# Altium PCB Tesla Coil PCB.PcbDoc
Units mil, origin at the board's own origin, x right, y up, seen from the top; angles counter-clockwise.
Board outline 5160.03 x 2730.03 mil, 2 copper layers (Top Layer, Bottom Layer); 43 components, 22 nets, 130 pads, 15 vias.
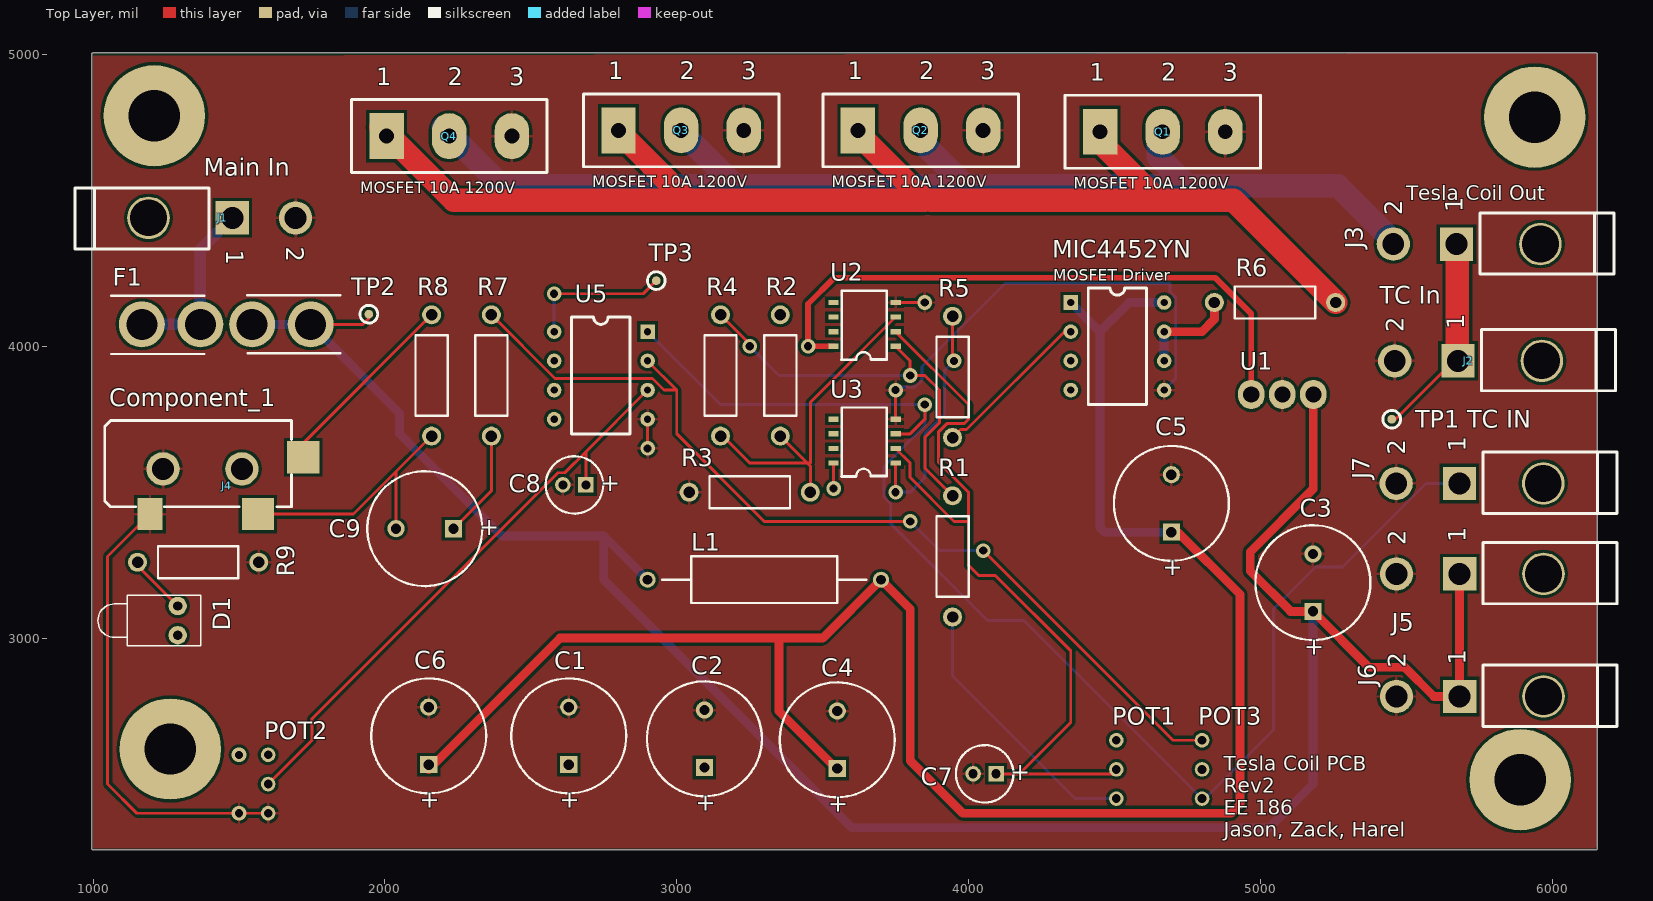
[diagram p0: Top Layer view]
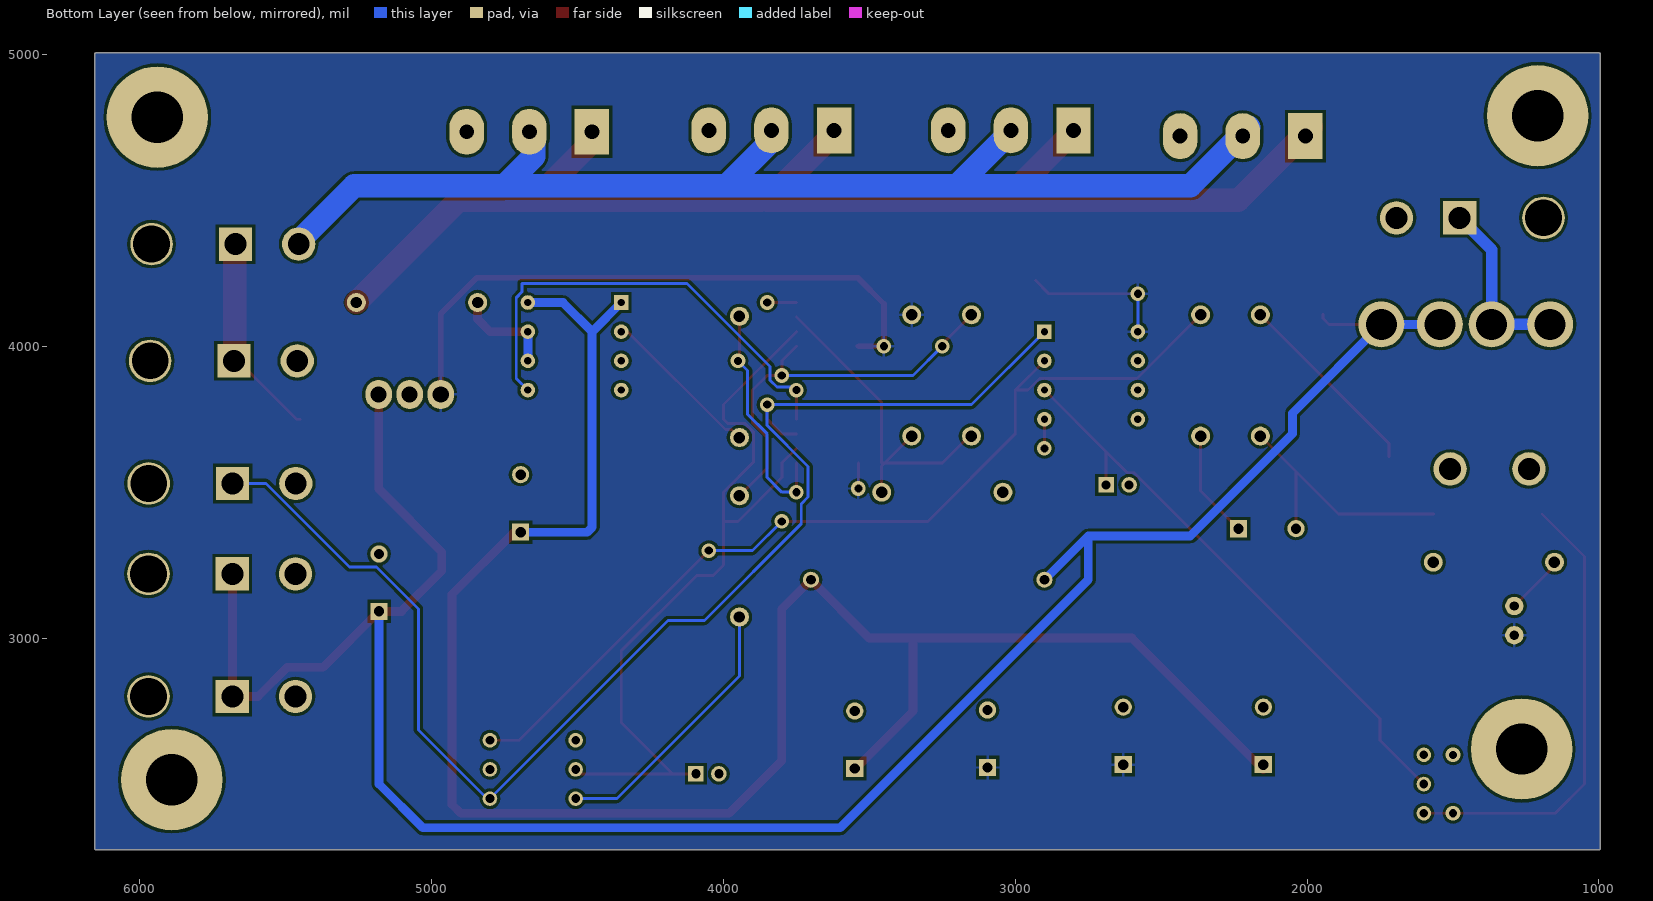
[diagram p1: Bottom Layer view, seen from below]

## Layer stack, top to bottom
Top Solder: solder mask 0.4, Solder Resist, Dk 3.5
Top Layer: signal copper 1.4
Dielectric 1: dielectric 12.6, FR-4, Dk 4.8
Bottom Layer: signal copper 1.4
Bottom Solder: solder mask 0.4, Solder Resist, Dk 3.5

## Board outline
995.65,2282.5 cw(c1000,2285) 994.99,2285 994.99,5000 cw(c1000,5000) 1000,5005.02 6150,5005.02 cw(c6150,5000) 6155.02,5000 6155.02,2280 cw(c6150,2280) 6150,2274.99 1000,2274.99 cw(c1000,2280)

## Design rules (kind name [scope] priority, off if disabled: settings)
Clearance [All] p1: gap=10
PlaneConnect [All] p1: planeconnectstyle=Relief reliefexpansion=20 reliefentries=4 reliefconductorwidth=20 reliefairgap=10
PolygonConnect [All] p1: connectstyle=Relief reliefconductorwidth=10 reliefentries=4 polygonreliefangle="90 Angle" airgapwidth=10
RoutingVias [All] p1: holewidth=28 width=50 viastyle="Through Hole" minholewidth=28 minwidth=50 maxholewidth=28 maxwidth=50
SolderMaskExpansion [All] p1: expansion=4
Width [All] p1: maxlimit=100 minlimit=10 preferedwidth=10 minimp=50.000000 maximp=50.000000 favimp=50.000000
29 further rules are at their usual default settings.

## Components (designator, comment, footprint, x,y, rotation, side; value= is the part's Value field where it differs from the comment)
C1 "Cap 5-10x30" CAPPR5-10X30 2630,2665 r90 top
C2 "Cap 5-10x30" CAPPR5-10X30 3095,2655 r90 top
C3 "Cap 5-10x30" CAPPR5-10X30 5180,3190 r90 top
C4 "Cap 5-10x30" CAPPR5-10X30 3550,2651.57 r90 top
C5 "Cap 5-10x30" CAPPR5-10X30 4695,3461.57 r90 top
C6 "Cap 5-10x30" CAPPR5-10X30 2150,2665 r90 top
C7 "Cap 2-5x11" CAPPR2-5X11 4055,2535 r180 top
C8 "Cap 2-5x11" CAPPR2-5X11 2649.37,3525 r180 top
C9 "Cap 5-10x30" CAPPR5-10X30 2136.57,3375 r180 top
D1 "LED1" LED-1 1290,3060 r180 top
F1 "1A" "Blade Fuse" 1566.42,3355 r90 top
J1 "Main In" "Mini-Fit Jr. 2" 1359.29,4440 r270 top
J2 "TC In" "Mini-Fit Jr. 2" 5795,3950 r90 top
J3 "TC Out" "Mini-Fit Jr. 2" 5790,4350 r90 top
J4 "Component_1" "3.5Jack Foot" 1715,3625 r180 top
J5 "Fan1" "Mini-Fit Jr. 2" 5800.71,3220 r90 top
J6 "Fan2" "Mini-Fit Jr. 2" 5800.71,2800 r90 top
J7 "Ext_IN" "Mini-Fit Jr. 2" 5800,3530 r90 top
L1 "Inductor Adj" AXIAL-0.8 3300,3200 r0 top
MIC4452YN "MOSFET Driver" MIC441/44 4350,4150 r0 top
POT1 "100k Pot Thumbwheel" "10K Pot 3352T" 4506.41,2450 r90 top
POT2 "100k Pot Thumbwheel" "10K Pot 3352T" 1600,2400 r90 top
POT3 "100k Pot Thumbwheel" "10K Pot 3352T" 4800,2450 r90 top
Q1 "SCT2450KEC" SCT2450KEC 4455.43,4735 r0 top
Q2 "SCT2450KEC" SCT2450KEC 3625.87,4740 r0 top
Q3 "SCT2450KEC" SCT2450KEC 2805.43,4740 r0 top
Q4 "SCT2450KEC" SCT2450KEC 2010.87,4720 r0 top
R1 "R Thru Hole" RES10.55-7X2.8 3945,3280 r270 top
R2 "R Thru Hole" RES10.55-7X2.8 3355,3900 r90 top
R3 "R Thru Hole" RES10.55-7X2.8 3250,3500 r0 top
R4 "R Thru Hole" RES10.55-7X2.8 3150,3900 r90 top
R5 "R Thru Hole" RES10.55-7X2.8 3945,3895 r270 top
R6 "R Thru Hole" RES10.55-7X2.8 5050,4150 r0 top
R7 "R Thru Hole" RES10.55-7X2.8 2365,3900 r270 top
R8 "R Thru Hole" RES10.55-7X2.8 2160,3900 r270 top
R9 "R Thru Hole" RES10.55-7X2.8 1360,3260 r180 top
"TP1 TC IN" "Test Point" "Test Point" 5450,3750 r0 top (schematic designator TP1)
TP2 "Test Point" "Test Point" 1945,4110 r90 top
TP3 "Test Point" "Test Point" 2930,4225 r90 top
U1 "REG" "5V REG" 5393.9,3835 r270 top
U2 "MCP6562-E/SN" MCP6562 3750,4000 r90 top
U3 "MCP6562-E/SN" MCP6562 3750,3600 r90 top
U5 "LM358 (DIP Socket)" 3M5473-ND- 2900,3750 r180 top

## Footprints (in the part's own frame and the unit in brackets; to place one, negate y for a bottom-side part, rotate by r counter-clockwise, add the part's x,y. Pads: shape width x height; smd on the part's side, far side on the other; paste and mask are expansions set on the pad)
"3.5Jack Foot" [mm]
  rect 2.8x2.8 smd: 1(3.81,5.08) 2(-0.127,0.127)
  round 2.9 hole 1.9: 3(12.065,1.143) 4(5.207,1.143)
  rect 2.2x2.794 smd: 3(13.208,5.08)
  silkscreen extent 0.89,-3.05 17.14,4.45
3M5473-ND- [mil]
  rect 50x50 hole 25: 1(0,-300)
  round 50 hole 25: 2(0,-200) 3(0,-100) 4(0,0) 5(320,0) 6(320,-100) 7(320,-200) 8(320,-300)
  silkscreen extent 60,-350 260,50
"5V REG" [mm]
  oval 2.54x2.3 hole 1.4: 1(0,-5.4) 2(0,-8.1) 3(0,-10.8)
"10K Pot 3352T" [mil]
  round 50 hole 30: 1(0,0) 2(100,0) 3(200,0)
AXIAL-0.8 [mm] "Axial Device, Thru-Hole; 2 Leads; 0.8 in Pin Spacing"
  round 1.4 hole 0.85: 1(-10.16,0) 2(10.16,0)
  silkscreen extent -8.89,-2.03 8.89,2.03
"Blade Fuse" [mm]
  round 4 hole 2.7 mask+0.064: 1(18.288,5.044) 1(18.288,10.144) 2(18.288,-4.556) 2(18.288,0.544)
  silkscreen extent 15.71,-7.16 20.81,12.82
CAPPR2-5X11 [mm]
  rect 1.35x1.35 hole 0.8: 1(-1,0)
  round 1.35 hole 0.8: 2(1,0)
  silkscreen extent -2.5,-2.5 2.5,2.5
CAPPR5-10X30 [mm]
  rect 1.5x1.5 hole 0.9: 1(-2.5,0)
  round 1.5 hole 0.9: 2(2.5,0)
  silkscreen extent -5,-5 5,5
LED-1 [mm] "Typical RED GaAs LED; 2 Leads"
  round 1.6 hole 0.8: 1(0,1.27) 2(0,-1.27)
  silkscreen extent -2,-2.2 6.95,2.2
MCP6562 [mm] "1.8V Output Comparator"
  rect 0.45x0.9 smd: 1(0,0) 2(1.27,0) 3(2.54,0) 4(3.81,0) 5(3.81,5.4) 6(2.54,5.4) 7(1.27,5.4) 8(0,5.4)
  silkscreen extent -1.17,0.76 4.83,4.7
MIC441/44 [mil]
  rect 50x50 hole 25: 1(0,0)
  round 50 hole 25: 2(0,-100) 3(0,-200) 4(0,-300) 5(320,-300) 6(320,-200) 7(320,-100) 8(320,0)
  silkscreen extent 60,-350 260,50
"Mini-Fit Jr. 2" [mm]
  rect 2.9x2.9 hole 1.9: 1(0,3)
  round 2.9 hole 1.9: 2(0,8.5)
  round 3.7 hole 3.2: 3(0,-4.3)
  silkscreen extent -2.6,-10.7 2.73,0.95, body extent -2.6,-10.87 3.2,9.07, height 11.4
RES10.55-7X2.8 [mm]
  round 1.65 hole 1: 1(-5.275,0) 2(5.275,0)
  silkscreen extent -3.5,-1.4 3.5,1.4
SCT2450KEC [mm] "Power MOSFET 10A, 1200V"
  rect 3x4 hole 1.3: 1(-0.127,0)
  oval 3x4 hole 1.3: 2(5.323,0) 3(10.773,0)
  silkscreen extent -3.17,-3.17 13.84,3.17
"Test Point" [mil] "Round Pad for Probing"
  round 30 smd: 1(0,0)
  silkscreen extent -30,-30 30,30

## Part data
C1 C2 C3 C4 C5 C6 C9: "Cap, Gen, 5-10x30"
C7 C8: "Cap, Gen, 2-5x11"
D1: "Typical RED GaAs LED"
F1: library part "Fuse 2", "Fuse"
J1 J2 J3 J5 J6 J7: library part "Mini-Fit Jr. 2-pin", "Mini-Fit Jr. 2-pin Right Angle"
L1: "Adjustable Inductor"
R1 R2 R3 R4 R5 R6 R7 R8 R9: "R, Gen, Thru Hole"

## Free pads (board coordinates)
  round 347.24 hole 175.98: 1(1210,4790) 1(1265,2620) 1(5890,2515) 1(5940,4785)

## Via types
v1: diameter 50, hole 28, Top Layer to Bottom Layer, 15 vias

## Nets (pads, with @x,y where several pads share a name; then routed paths per layer and width w, separated by ;. In a path a pad name is that pad's centre, name@x,y a point inside that pad or via, vN(x,y) a via of type N, cw(c..) or ccw(c..) an arc to the next point about the centre after c; other vN are vias at no path point)
5V: C1.1 C2.1 D1.1 R2.2 TP3.1 U1.3 U2.8 U3.8 U5.8 | length 2714.6
  Top Layer w10: v1(2580,4180) 2885,4180 TP3.1 ; R2.2@3355,4095 R2.2 ; v1(3537.4,3512.6) U3.8
  Top Layer w20: U2.8 v1(3450,4000) 3450,4145 3540,4235 4845,4235 4968.7,4111.3 U1.3
  Bottom Layer w10: U5.8 v1(2580,4180)
12V: C3.1 F1.2 J5.1 J6.1 L1.1 TP2.1 U1.1 | length 7601.6
  Top Layer w10: F1.2@1745.79,4075 1925,4075 1945,4095 TP2.1
  Top Layer w30: U1.1 5181.3,3511.3 4965,3295 4965,3230 5103.43,3091.57 C3.1 5371.57,2900 5495,2900 5595,2800 J6.1 J5.1
  Bottom Layer w30: F1.2@1545,4075 1745.79,4075 2050,3770.79 2050,3700 2400,3350 2750,3350 ; L1.1 2750,3350 ; C3.1@5180,3101.57 C3.1 ; C3.1@5190,3081.57 C3.1 ; 2750,3350 2750,3200 3600,2350 5030,2350 5180,2500 C3.1
"12V D": C4.1 C5.1 C6.1 L1.2 MIC4452YN.1 MIC4452YN.8 | length 6598.6
  Top Layer w30: C6.1@2150,2550 2600,3000 3350,3000 ; C4.1@3550,2550 3350,2750 3350,3000 ; C5.1 4716.85,3363.15 4930,3150 4930,2430 4900,2400 3980,2400 3800,2580 3800,3100 L1.2 3500,3000 3350,3000
  Bottom Layer w30: MIC4452YN.1 4450,4050 ; MIC4452YN.8 4550,4150 4450,4050 ; C5.1 4466.85,3363.15 4450,3380 4450,4050
GND: C1.2 C2.2 C3.2 C4.2 C5.2 C6.2 C7.2 C8.2 J1.2 J2.2 J4.3 J5.2 J6.2 J7.2 MIC4452YN.5 POT2.1 Q1.3 Q2.3 Q3.3 Q4.3 R3.1 R9.1 U1.2 U2.4 U3.4 U5.4 | length 3385.1
  Top Layer w10: J4.3@1195,3425 1050,3280 1050,2500 1150,2400 v1(1500,2400) POT2.1 ; v1(2900,3650) U5.4 ; U3.4 v1(3750,3850) ; U2.4 v1(3850,4150)
  Bottom Layer w10: v1(3750,3850) 3760,3860 3816.57,3860 3840,3883.43 3840,3930.53 4124.47,4215 4690,4215 4690,4186.57 4710,4166.57 4710,3890 MIC4452YN.5
NetC7_1: C7.1 POT1.2 U2.2 U3.2 | length 2807.3
  Top Layer w10: U3.2 3800,3600 3800,3550 3950,3400 4000,3400 ; U2.2 4000,3800 4000,3750 3984.8,3734.8 3925.33,3734.8 3897.52,3706.99 3897.52,3602.48 4000,3500 4000,3400 ; C7.1 4174.37,2535 ; POT1.2 4491.41,2535 4174.37,2535 ; 4000,3400 4000,3250 4035,3215 4091.57,3215 4350,2956.57 4350,2710.63 4174.37,2535
  Bottom Layer w10: POT1.2@4489.37,2550 POT1.2
NetC8_1: C8.1 POT2.2 U5.3 | length 2016.2
  Top Layer w10: POT2.2 1750,2650 1750,2723.8 2592.78,3566.57 2616.57,3566.57 2688.74,3638.74 ; C8.1 2688.74,3638.74 ; U5.3 2688.74,3638.74
NetC9_1: C9.1 R7.2 | length 371.2
  Top Layer w10: C9.1 2365,3505 R7.2
NetC9_2: C9.2 J4.1 R8.2 | length 901.2
  Top Layer w10: J4.1 1892.68,3425 2038.15,3570.47 ; C9.2 2038.15,3570.47 ; R8.2 2038.15,3570.47
NetD1_2: D1.2 R9.2 | length 207
  Top Layer w10: R9.2 1152.32,3247.68 D1.2
NetF1_1: F1.1 J1.1 | length 611.2
  Bottom Layer w40: F1.1@1167.05,4075 1367.83,4075 1367.83,4330.43 J1.1
NetJ3_2: J3.2 Q1.2 Q2.2 Q3.2 Q4.2 | length 4219.3
  Bottom Layer w80: Q4.2@2200,4750 2400,4550 3200,4550 ; Q3.2@3000,4750 3200,4550 ; Q2.2@3835.43,4750 Q2.2 3835.43,4704.57 3990,4550 ; Q1.2@4650,4750 4650,4650 4750,4550 ; J3.2@5465.35,4350 5265.35,4550 4750,4550 ; 3200,4550 3990,4550 ; 3990,4550 4750,4550
NetJ4_2: J4.2 R8.1 | length 669.9
  Top Layer w10: J4.2 1720,3667.68 R8.1
NetJ7_1: J7.1 POT3.1 U3.3 U5.1 | length 4729.3
  Top Layer w10: U3.3 3800,3700 3850,3750 v1(3850,3800)
  Bottom Layer w10: U5.1 3150,3800 v1(3850,3800) 3850,3728.28 3710,3588.28 3710,3483.43 3733.43,3460 3733.43,3391.57 4065,3060 4190,3060 POT3.1 4810,2450 5045,2685 5045,3100 5188.9,3243.9 5281.2,3243.9 5567.3,3530 J7.1
NetMIC4452YN_2: MIC4452YN.2 R5.2 | length 555.2
  Top Layer w10: R5.2 3972.48,3714.8 3993.09,3714.8 4328.28,4050 MIC4452YN.2
NetMIC4452YN_6: MIC4452YN.6 MIC4452YN.7 R6.1 | length 358.4
  Top Layer w10: MIC4452YN.7 MIC4452YN.7@4677.68,4057.68
  Top Layer w30: MIC4452YN.7 4800,4050 4842.32,4092.32 R6.1
  Bottom Layer w30: MIC4452YN.6 MIC4452YN.7
NetPOT1_1: POT1.1 R1.2 | length 931.3
  Bottom Layer w10: R1.2 3945,2870 4365,2450 POT1.1@4500,2450
NetPOT3_3: POT3.3 R7.1 U5.2 | length 3268.1
  Top Layer w10: R7.1 2582.68,3890 2916.57,3890 2956.57,3850 3000,3850 ; U5.2 3000,3850 ; v1(3800,3400) 3300,3400 3000,3700 3000,3850 ; v1(4050,3300) 4700,2650 POT3.3
  Bottom Layer w10: v1(3800,3400) 3900,3300 v1(4050,3300)
NetQ1_1: Q1.1 Q2.1 Q3.1 Q4.1 R6.2 | length 4531.1
  Top Layer w10: Q1.1@4435.43,4714.57 Q1.1@4435.43,4750
  Top Layer w80: Q4.1@1985.43,4750 2235.43,4500 3035.43,4500 ; Q3.1@2785.43,4750 3035.43,4500 ; Q2.1@3610.43,4739.57 3850,4500 3035.43,4500 ; 3870.87,4500 4650,4500 ; Q1.1@4435.43,4714.57 4650,4500 ; R6.2 4907.68,4500 4650,4500
NetR1_1: R1.1 R4.2 U2.1 | length 1396.6
  Top Layer w10: R4.2 v1@3250,4007.68 ; U2.1 3800,3950 v1(3800,3900) 3850,3900 3900,3850 3900,3737.75 3850,3687.75 3850,3582.68 R1.1
  Bottom Layer w10: v1(3250,4000) 3350,3900 v1(3800,3900)
NetR2_1: R2.1 R3.2 R4.1 U2.3 | length 1201.9
  Top Layer w10: R4.1 3157.68,3692.32 3250,3600 3447.32,3600 ; R2.1 3447.32,3600 ; R3.2 3457.68,3589.65 3447.32,3600 ; U2.3 3457.68,3807.68 3457.68,3600 3447.32,3600
NetR5_1: R5.1 U3.1 | length 816.9
  Top Layer w10: v1(3750,3500) U3.1 ; R5.1 3945,3955 v1(3950,3950)
  Bottom Layer w10: v1(3750,3500) 3800,3500 3850,3550 3850,3700 3917.05,3767.05 3917.05,3917.05 v1(3950,3950)
"TC Vin": "TP1 TC IN.1" J2.1 J3.1 | length 703.4
  Top Layer w10: 5450,3750 5462.6,3750 J2.1@5675,3962.4 ; J3.1@5675,4343.11 J3.1@5681.89,4350
  Top Layer w80: J2.1@5675,3962.4 J3.1@5675,4343.11
pads on no net: J1.3 J2.3 J3.3 J4.4 J5.3 J6.3 J7.3 MIC4452YN.3 MIC4452YN.4 POT1.3 POT2.3 POT3.2 U2.5 U2.6 U2.7 U3.5 U3.6 U3.7 U5.5 U5.6 U5.7
copper on no net:
  other v1: 1500,2600

## Polygon pours and split planes (outlines as drawn)
GND on Top Layer "GND" (solid, pour order 0): 1000,4995 1000,2280 6145,2280 6155,2290 6155,5005
5V on Bottom Layer "5V" (solid, pour order 4): 995,5005 995,2275 6155,2275 6155,5005

## Silkscreen, mask and mechanical layers (free items; w line width, h text height)
Top Overlay:
  text "Tesla Coil Out" at 5500,4500 h50
  text "Tesla Coil PCB  / Rev2 / EE 186 / Jason, Zack, Harel" at 4875,2320 h50
Mechanical 1:
  lines w10: 1000,2280 6150,2280 6150,2770 6150,5000 1000,5000 1000,2285

## Text inside footprints (layer, text, board x,y; h text height)
C1: Top Overlay "+" at 2659.53,2410.08 h59.05 r90
C2: Top Overlay "+" at 3124.53,2400.08 h59.05 r90
C3: Top Overlay "+" at 5209.53,2935.08 h59.05 r90
C4: Top Overlay "+" at 3579.53,2396.65 h59.05 r90
C5: Top Overlay "+" at 4724.53,3206.65 h59.05 r90
C6: Top Overlay "+" at 2179.53,2410.08 h59.05 r90
C7: Top Overlay "+" at 4211.5,2564.53 h59.05 r180
C8: Top Overlay "+" at 2805.87,3554.53 h59.05 r180
C9: Top Overlay "+" at 2391.5,3404.53 h59.05 r180
J1: Top Overlay "2" at 1662.44,4341.57 h60 r270; Top Overlay "1" at 1455.94,4331.14 h60 r270
J2: Top Overlay "2" at 5491.85,4048.43 h60 r90; Top Overlay "1" at 5698.35,4058.86 h60 r90
J3: Top Overlay "2" at 5486.85,4448.43 h60 r90; Top Overlay "1" at 5693.35,4458.86 h60 r90
J5: Top Overlay "2" at 5497.56,3318.43 h60 r90; Top Overlay "1" at 5704.06,3328.86 h60 r90
J6: Top Overlay "2" at 5497.56,2898.43 h60 r90; Top Overlay "1" at 5704.06,2908.86 h60 r90
J7: Top Overlay "2" at 5496.85,3628.43 h60 r90; Top Overlay "1" at 5703.35,3638.86 h60 r90
Q1: Top Overlay "3" at 4870.43,4910 h60; Top Overlay "2" at 4660.43,4910 h60; Top Overlay "1" at 4415.43,4910 h60; Top Overlay "MOSFET 10A 1200V" at 4360.43,4540 h39.37
Q2: Top Overlay "3" at 4040.87,4915 h60; Top Overlay "2" at 3830.87,4915 h60; Top Overlay "1" at 3585.87,4915 h60; Top Overlay "MOSFET 10A 1200V" at 3530.87,4545 h39.37
Q3: Top Overlay "3" at 3220.43,4915 h60; Top Overlay "2" at 3010.43,4915 h60; Top Overlay "1" at 2765.43,4915 h60; Top Overlay "MOSFET 10A 1200V" at 2710.43,4545 h39.37
Q4: Top Overlay "3" at 2425.87,4895 h60; Top Overlay "2" at 2215.87,4895 h60; Top Overlay "1" at 1970.87,4895 h60; Top Overlay "MOSFET 10A 1200V" at 1915.87,4525 h39.37